# Altium PCB PCB3.PcbDoc
Units mm, origin at the board's own origin, x right, y up, seen from the top; angles counter-clockwise.
Board outline 195 x 40 mm, 2 copper layers (Top Layer, Bottom Layer); 40 components, 40 nets, 128 pads, 6 vias.
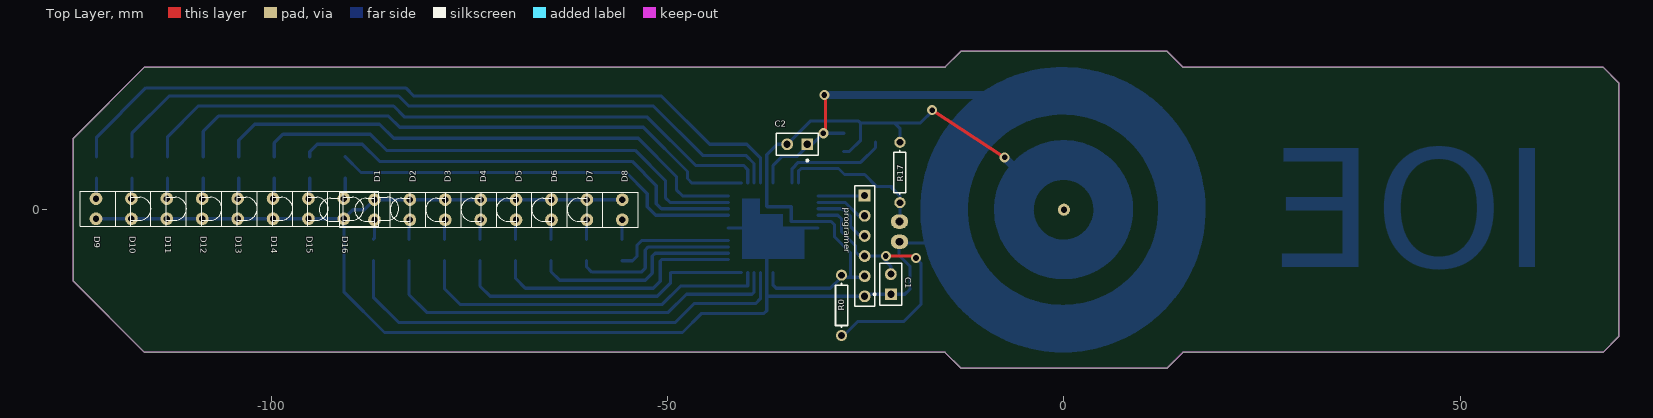
[diagram p0: Top Layer view]
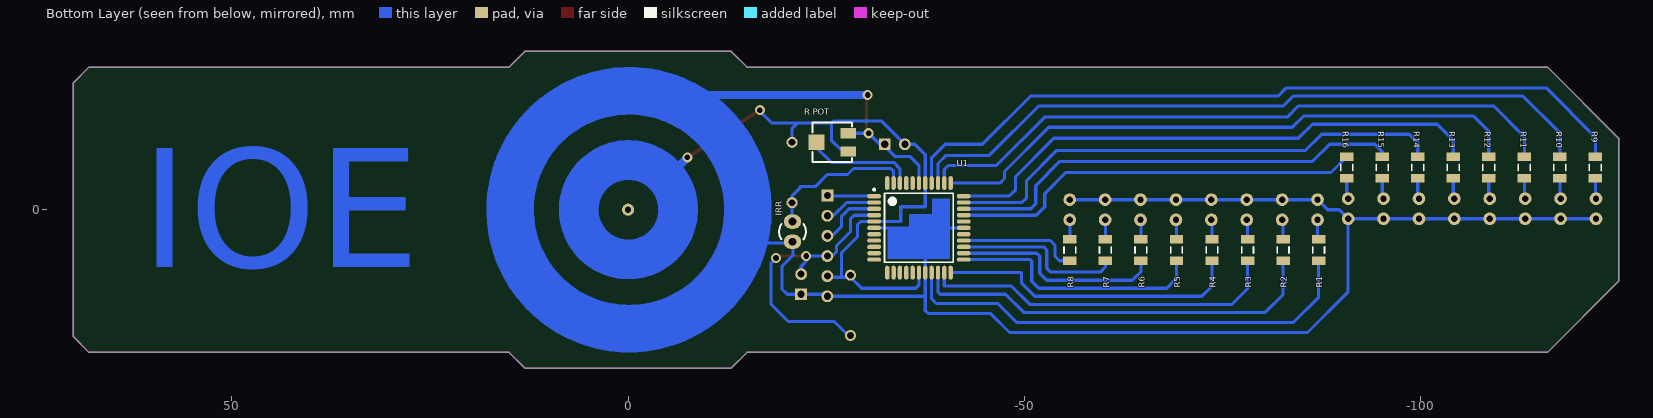
[diagram p1: Bottom Layer view, seen from below]

## Layer stack, top to bottom
Top Solder: solder mask 0.0102, Solder Resist, Dk 3.5
Top Layer: signal copper 0.0356
Dielectric 1: dielectric 0.32, FR-4, Dk 4.8
Bottom Layer: signal copper 0.0356
Bottom Solder: solder mask 0.0102, Solder Resist, Dk 3.5

## Board outline
-116,-18 -15,-18 -13,-20 13,-20 15,-18 68,-18 70,-16 70,16 68,18 15,18 13,20 -13,20 -15,18 -116,18 -125,9 -125,-9

## Design rules (kind name [scope] priority, off if disabled: settings)
Clearance [All] p1: gap=0.2 ignorepadtopadclearanceinfootprint=FALSE
PolygonConnect [All] p1: connectstyle=Relief reliefconductorwidth=0.254 reliefentries=4 polygonreliefangle="90 Angle" airgapwidth=0.254
RoutingVias [All] p1: holewidth=0.711 width=1.27 viastyle="Through Hole" minholewidth=0.711 minwidth=1.27 maxholewidth=0.711 maxwidth=1.27
SolderMaskExpansion [All] p1: expansion=0.102 istentingtop=FALSE
Width [All] p1: maxlimit=20 minlimit=0.254 preferedwidth=0.3
30 further rules are at their usual default settings.

## Components (designator, comment, footprint, x,y, rotation, side; value= is the part's Value field where it differs from the comment)
C1 "Cap" PIN2 -21.844,-10.668 r90 top value=100pF
C2 "Cap" PIN2 -32.385,8.255 r180 top value=100pF
D1 "LED1" LED-1 -86.995,0 r180 top
D2 "LED1" LED-1 -82.528,0 r180 top
D3 "LED1" LED-1 -78.061,0 r180 top
D4 "LED1" LED-1 -73.594,0 r180 top
D5 "LED1" LED-1 -69.127,0 r180 top
D6 "LED1" LED-1 -64.66,0 r180 top
D7 "LED1" LED-1 -60.193,0 r180 top
D8 "LED1" LED-1 -55.726,0 r180 top
D9 "LED1" LED-1 -122.123,0.127 r0 top
D10 "LED1" LED-1 -117.656,0.127 r0 top
D11 "LED1" LED-1 -113.189,0.127 r0 top
D12 "LED1" LED-1 -108.722,0.127 r0 top
D13 "LED1" LED-1 -104.255,0.127 r0 top
D14 "LED1" LED-1 -99.788,0.127 r0 top
D15 "LED1" LED-1 -95.321,0.127 r0 top
D16 "LED1" LED-1 -90.854,0.127 r0 top
IRR "IR R" LED-3MM -20.75,-4.04 r90 bottom
programer "Header 6" HDR1X6 -25.146,1.778 r270 top
R0 "Res1" AXIAL-0.3 -28.067,-12.065 r90 top value=1K
R1 "Res1" C1206 -87.122,-5.08 r90 bottom value=1K
R2 "Res1" C1206 -82.641,-5.08 r90 bottom value=1K
R3 "Res1" C1206 -78.159,-5.08 r90 bottom value=1K
R4 "Res1" C1206 -73.678,-5.08 r90 bottom value=1K
R5 "Res1" C1206 -69.197,-5.08 r90 bottom value=1K
R6 "Res1" C1206 -64.716,-5.08 r90 bottom value=1K
R7 "Res1" C1206 -60.234,-5.08 r90 bottom value=1K
R8 "Res1" C1206 -55.753,-5.08 r90 bottom value=1K
R9 "Res1" C1206 -122.047,5.334 r270 bottom value=1K
R10 "Res1" C1206 -117.566,5.334 r270 bottom value=1K
R11 "Res1" C1206 -113.084,5.334 r270 bottom value=1K
R12 "Res1" C1206 -108.603,5.334 r270 bottom value=1K
R13 "Res1" C1206 -104.122,5.334 r270 bottom value=1K
R14 "Res1" C1206 -99.641,5.334 r270 bottom value=1K
R15 "Res1" C1206 -95.159,5.334 r270 bottom value=1K
R16 "Res1" C1206 -90.678,5.334 r270 bottom value=1K
R17 "Res1" AXIAL-0.3 -20.701,4.699 r90 top value=4.7K
"R POT" "10K" POT4MM-2 -25.781,8.509 r0 bottom
U1 "ATmega32A-AU" 44A_N -36.703,-2.286 r180 bottom

## Footprints (in the part's own frame and the unit in brackets; to place one, negate y for a bottom-side part, rotate by r counter-clockwise, add the part's x,y. Pads: shape width x height; smd on the part's side, far side on the other; paste and mask are expansions set on the pad)
44A_N [mm] "Thin QFP, 44-Leads, Body 10x10mm, Pitch 0.8mm, IPC Medium Density"
  oval 1.75x0.55 smd: 1(-5.65,4) 2(-5.65,3.2) 3(-5.65,2.4) 4(-5.65,1.6) 5(-5.65,0.8) 6(-5.65,0) 7(-5.65,-0.8) 8(-5.65,-1.6) 9(-5.65,-2.4) 10(-5.65,-3.2) 11(-5.65,-4) 23(5.65,-4) 24(5.65,-3.2) 25(5.65,-2.4) 26(5.65,-1.6) 27(5.65,-0.8) 28(5.65,0) 29(5.65,0.8) 30(5.65,1.6) 31(5.65,2.4) 32(5.65,3.2) 33(5.65,4)
  oval 0.55x1.75 smd: 12(-4,-5.65) 13(-3.2,-5.65) 14(-2.4,-5.65) 15(-1.6,-5.65) 16(-0.8,-5.65) 17(0,-5.65) 18(0.8,-5.65) 19(1.6,-5.65) 20(2.4,-5.65) 21(3.2,-5.65) 22(4,-5.65) 34(4,5.65) 35(3.2,5.65) 36(2.4,5.65) 37(1.6,5.65) 38(0.8,5.65) 39(0,5.65) 40(-0.8,5.65) 41(-1.6,5.65) 42(-2.4,5.65) 43(-3.2,5.65) 44(-4,5.65)
  silkscreen extent -5.77,-4.35 4.35,4.95, body extent -5,-5 5,5, height 1.2
AXIAL-0.3 [mm] "Axial Device, Thru-Hole; 2 Leads; 0.3 in Pin Spacing"
  round 1.4 hole 0.85: 1(-3.81,0) 2(3.81,0)
  silkscreen extent -2.77,-0.76 2.77,0.76
C1206 [mm] "Chip Capacitor, Body 3.2x1.6mm, IPC High Density"
  rect 1.1x1.7 smd: 1(-1.35,0) 2(1.35,0)
  silkscreen extent -0.4,-0.75 0.4,0.75, body extent -1.7,-0.9 1.7,0.9, height 1.3
HDR1X6 [mm] "Connector; Header; 6 Position"
  rect 1.5x1.5 hole 0.9: 1(0,0)
  round 1.5 hole 0.9: 2(2.54,0) 3(5.08,0) 4(7.62,0) 5(10.16,0) 6(12.7,0)
  silkscreen extent -1.27,-1.27 13.97,1.27
LED-1 [mm] "LED; 2 Leads"
  round 1.6 hole 0.8: 1(0,1.27) 2(0,-1.27)
  silkscreen extent -2,-2.2 6.95,2.2
LED-3MM [mm]
  oval 1.8x2.2 hole 1: A(0,0)
  oval 1.8x2.2 hole 1 mask+0.102: K(2.54,0)
  silkscreen extent 0.31,-1.7 2.23,1.7, body extent -0.33,-1.6 2.87,1.6, height 9.5
PIN2 [mm] "Photosensitive Diode; 2 Leads"
  rect 1.5x1.5 hole 0.9: 1(0,0)
  round 1.5 hole 0.9: 2(2.54,0)
  silkscreen extent -1.4,-1.4 3.94,2.17
POT4MM-2 [mm] "Square Trimming Potentiometer"
  rect 2x1.3 smd: CCW(-2,-1.15) CW(-2,1.15)
  rect 2x2 smd: W(2,0)
  silkscreen extent -2.5,-2.5 2.5,2.5

## Part data
C1 C2: "Capacitor", LatestRevisionDate=17-Jul-2002, LatestRevisionNote="Re-released for DXP Platform.", PackageDescription="Radial Cap, Thru-Hole; 2 Leads; 0.3 in Pin Spacing", PackageReference=RAD-0.3, Published=8-Jun-2000, Publisher="Altium Limited"
D1 D2 D3 D4 D5 D6 D7 D8 D9 D10 D11 D12 D13 D14 D15 D16: library part LED2, "Typical RED, GREEN, YELLOW, AMBER GaAs LED", LatestRevisionDate=17-Jul-2002, LatestRevisionNote="Re-released for DXP Platform.", PackageDescription="SM LED; 2 Flat Leads", PackageReference=3.2X1.6X1.1, PackageVersion=Feb-2002, Published=8-Jun-2000, Publisher="Altium Limited"
IRR: library part IRR, "IR Receiver"
programer: "Header, 6-Pin", LatestRevisionDate=17-Jul-2002, LatestRevisionNote="Re-released for DXP Platform.", Publisher="Altium Limited"
R0 R1 R2 R3 R4 R5 R6 R7 R8 R9 R10 R11 R12 R13 R14 R15 R16 R17: "Resistor", LatestRevisionDate=17-Jul-2002, LatestRevisionNote="Re-released for DXP Platform.", PackageDescription="Axial Device, Thru-Hole; 2 Leads; 0.3 in Pin Spacing", PackageReference=AXIAL-0.3, Published=8-Jun-2000, Publisher="Altium Limited"
"R POT": library part "RPot SM", "Square Trimming Potentiometer", ComponentLink1Description="Manufacturer Link", ComponentLink1URL=http://bourns.com/2/search.html, DatasheetVersion=Oct-2003, PackageDescription="Square Trimming Potentiometer", PackageReference=POT4MM-2, Published=17-Dec-2003, Publisher="Altium Limited"
U1: "8-bit AVR Microcontroller, 32KB Flash, 1KB EEPROM, 2KB SRAM, 44-pin TQFP, Industrial Grade (-40°C to 85°C)", Supplier Part Number 1=ATMEGA32A-AU-ND, ComponentLink1Description="Manufacturer Link", ComponentLink1URL=http://www.atmel.com/products/avr/default.asp?, ComponentLink2Description="ATmega32A Datasheet", ComponentLink2URL=http://www.atmel.com/dyn/resources/prod_documents/doc8155.pdf, ComponentLink3Description="ATmega32A Summary", ComponentLink3URL=http://www.atmel.com/dyn/resources/prod_documents/8155S.pdf, ComponentLink4Description="Atmel.com Home", ComponentLink4URL=http://www.atmel.com, DatasheetVersion="revB, Jul-2009", PackageDescription="44-Pin Plastic Thin Profile Quad Flat Pack, 10 x 10 x 1.0 mm Body, 0.8 mm Pitch (TQFP)", PackageReference=44A, PackageVersion="rev.B, Oct-2001", Published=1-Apr-2010, Publisher="Altium Limited", Supplier 1=Digi-Key, Supplier 2=Farnell, Supplier 3=Mouser, Supplier Part Number 2=1704563, Supplier Part Number 3=556-ATMEGA32A-AU

## Free pads (board coordinates)
  round 1.524 hole 0.762: 0(0,0)

## Via types
v1: diameter 1.27, hole 0.711, Top Layer to Bottom Layer, 6 vias

## Nets (pads, with @x,y where several pads share a name; then routed paths per layer and width w, separated by ;. In a path a pad name is that pad's centre, name@x,y a point inside that pad or via, vN(x,y) a via of type N, cw(c..) or ccw(c..) an arc to the next point about the centre after c; other vN are vias at no path point)
GND: "R POT.CCW" C1.1 C2.1 D1.2 D2.2 D3.2 D4.2 D5.2 D6.2 D7.2 D8.2 D9.2 D10.2 D11.2 D12.2 D13.2 D14.2 D15.2 D16.2 IRR.A programer.6 U1.6 U1.18 U1.28 U1.39 | length 326.8
  Top Layer w0.4: v1(-30.353,9.652) -30.099,9.906 -30.099,14.351 v1(-30.226,14.478)
  Bottom Layer w0.4: D9.2 D10.2 D11.2 D12.2 D13.2 D14.2 D15.2 D16.2 ; D8.2 D7.2 D6.2 D5.2 D4.2 D3.2 D2.2 D1.2 -88.265,0 -89.711,0 D16.2 ; U1.28 -39.497,-2.286 -36.703,-2.286 ; -37.376,-10.922 programer.6 -24.892,-10.668 C1.1 -20.066,-10.668 -19.431,-10.033 -19.431,-7.112 -20.828,-5.715 -20.828,-4.191 -15.933,-4.191 ; U1.39 -36.703,5.588 -35.56,6.731 -33.655,6.731 -32.385,8.001 C2.1 -31.75,8.255 v1(-30.353,9.652) ; U1.6 -36.703,-2.286 ; v1@-30.353,9.659 -27.781,9.659 ; v1(-30.226,14.478) v1@-30.035,14.478 ; -10.795,11.636 -10.795,14.478 ; D16.2 -90.854,-10.365 -85.725,-15.494 -48.133,-15.494 -45.72,-13.081 -37.846,-13.081 -37.503,-12.738 -37.503,-10.922 U1.18 -37.503,-3.086 -36.703,-2.286
  Bottom Layer w1: v1@-30.101,14.478 -30.035,14.478 -11.5,14.478 ; -10.795,14.478 -11.5,14.478 ; -3.97,14.499 -11.5,14.478
  Bottom Layer w6: 14.868,0.388 ccw(c-0.127,0) 14.872,0.123
MISO: programer.2 U1.2 | length 6.6
  Bottom Layer w0.4: U1.2 -27.584,0.914 -25.908,-0.762 programer.2
MOSI: programer.1 U1.1 | length 5.9
  Bottom Layer w0.4: U1.1 -25.21,1.714 programer.1
NetD1_1: D1.1 R1.2 | length 2.5
  Bottom Layer w0.4: R1.2 -86.995,-3.603 D1.1
NetD2_1: D2.1 R2.2 | length 2.5
  Bottom Layer w0.4: R2.2 -82.641,-1.383 D2.1
NetD3_1: D3.1 R3.2 | length 2.5
  Bottom Layer w0.4: R3.2 -78.159,-1.368 D3.1
NetD4_1: D4.1 R4.2 | length 2.5
  Bottom Layer w0.4: R4.2 -73.678,-1.354 D4.1
NetD5_1: D5.1 R5.2 | length 2.5
  Bottom Layer w0.4: R5.2 -69.197,-1.34 D5.1
NetD6_1: D6.1 R6.2 | length 2.5
  Bottom Layer w0.4: R6.2 -64.716,-1.326 D6.1
NetD7_1: D7.1 R7.2 | length 2.5
  Bottom Layer w0.4: R7.2 -60.234,-1.311 D7.1
NetD8_1: D8.1 R8.2 | length 2.5
  Bottom Layer w0.4: R8.2 -55.753,-1.297 D8.1
NetD9_1: D9.1 R9.2 | length 2.6
  Bottom Layer w0.4: D9.1 -122.047,1.473 R9.2
NetD10_1: D10.1 R10.2 | length 2.6
  Bottom Layer w0.4: D10.1 -117.566,1.487 R10.2
NetD11_1: D11.1 R11.2 | length 2.6
  Bottom Layer w0.4: D11.1 -113.084,1.502 R11.2
NetD12_1: D12.1 R12.2 | length 2.6
  Bottom Layer w0.4: D12.1 -108.603,1.516 R12.2
NetD13_1: D13.1 R13.2 | length 2.6
  Bottom Layer w0.4: D13.1 -104.122,1.53 R13.2
NetD14_1: D14.1 R14.2 | length 2.6
  Bottom Layer w0.4: D14.1 -99.641,1.545 R14.2
NetD15_1: D15.1 R15.2 | length 2.7
  Bottom Layer w0.4: D15.1 -95.159,1.559 R15.2
NetD16_1: D16.1 R16.2 | length 2.7
  Bottom Layer w0.4: D16.1 -90.678,1.573 R16.2
NetIRR_K: IRR.K R17.1 U1.43 | length 19.3
  Bottom Layer w0.4: U1.43 -33.503,4.851 -33.147,5.207 -28.448,5.207 -27.686,4.445 -25.146,4.445 -23.622,2.921 -21.844,2.921 ; -21.717,2.921 -21.844,2.921 ; IRR.K@-20.701,-1.524 R17.1 -20.701,1.778 -21.844,2.921
NetR1_1: R1.1 U1.19 | length 59.3
  Bottom Layer w0.4: R1.1 -87.122,-11.049 -83.947,-14.224 -49.022,-14.224 -46.609,-11.811 -38.862,-11.811 -38.303,-11.252 U1.19
NetR2_1: R2.1 U1.20 | length 52.3
  Bottom Layer w0.4: R2.1 -82.641,-10.704 -80.391,-12.954 -49.911,-12.954 -47.625,-10.668 -39.37,-10.668 -39.103,-10.401 U1.20
NetR3_1: R3.1 U1.21 | length 45.3
  Bottom Layer w0.4: R3.1 -78.159,-9.979 -76.2,-11.938 -50.673,-11.938 -48.362,-9.627 -39.903,-9.627 U1.21
NetR4_1: R4.1 U1.22 | length 38.7
  Bottom Layer w0.4: R4.1 -73.678,-9.634 -72.39,-10.922 -51.308,-10.922 -49.657,-9.271 -49.657,-8.001 -49.592,-7.936 U1.22
NetR5_1: R5.1 U1.23 | length 32.6
  Bottom Layer w0.4: R5.1 -69.197,-8.654 -67.945,-9.906 -51.816,-9.906 -50.927,-9.017 -50.927,-6.477 -50.736,-6.286 U1.23
NetR6_1: R6.1 U1.24 | length 26.9
  Bottom Layer w0.4: R6.1 -64.716,-7.801 -63.627,-8.89 -52.832,-8.89 -51.943,-8.001 -51.943,-5.842 -51.587,-5.486 U1.24
NetR7_1: R7.1 U1.25 | length 21.6
  Bottom Layer w0.4: R7.1 -60.234,-7.203 -59.563,-7.874 -53.34,-7.874 -52.832,-7.366 -52.832,-5.08 -52.438,-4.686 U1.25
NetR8_1: R8.1 U1.26 | length 15.3
  Bottom Layer w0.4: R8.1 -54.436,-6.43 -53.848,-5.842 -53.848,-4.445 -53.289,-3.886 U1.26
NetR9_1: R9.1 U1.37 | length 95.6
  Bottom Layer w0.4: R9.1 -122.047,9.144 -115.824,15.367 -83.058,15.367 -82.042,14.351 -50.8,14.351 -44.704,8.255 -40.005,8.255 -38.303,6.553 U1.37
NetR10_1: R10.1 U1.36 | length 89.4
  Bottom Layer w0.4: R10.1 -117.566,9.688 -112.903,14.351 -83.947,14.351 -82.677,13.081 -51.816,13.081 -45.593,6.858 -40.132,6.858 -39.103,5.829 U1.36
NetR11_1: R11.1 U1.35 | length 82.3
  Bottom Layer w0.4: R11.1 -113.084,9.217 -109.22,13.081 -84.582,13.081 -83.185,11.684 -52.578,11.684 -46.482,5.588 -40.436,5.588 -39.903,5.055 U1.35
NetR12_1: R12.1 U1.34 | length 75.9
  Bottom Layer w0.4: R12.1 -108.603,9.888 -106.68,11.811 -85.217,11.811 -83.82,10.414 -53.086,10.414 -47.498,4.826 -47.498,3.937 -46.925,3.364 U1.34
NetR13_1: R13.1 U1.33 | length 69.4
  Bottom Layer w0.4: R13.1 -104.122,8.781 -102.108,10.795 -86.36,10.795 -84.582,9.017 -53.721,9.017 -48.895,4.191 -48.895,2.54 -48.069,1.714 U1.33
NetR14_1: R14.1 U1.32 | length 64.3
  Bottom Layer w0.4: R14.1 -99.641,8.436 -98.552,9.525 -87.503,9.525 -85.471,7.493 -54.102,7.493 -50.292,3.683 -50.292,1.524 -49.682,0.914 U1.32
NetR15_1: R15.1 U1.31 | length 58.5
  Bottom Layer w0.4: R15.1 -95.159,7.33 -94.234,8.255 -88.519,8.255 -86.36,6.096 -54.483,6.096 -51.435,3.048 -51.435,0.762 -50.787,0.114 U1.31
NetR16_1: R16.1 U1.30 | length 52.3
  Bottom Layer w0.4: R16.1 -88.693,4.699 -55.245,4.699 -52.578,2.032 -52.578,0.381 -51.511,-0.686 U1.30
"NetR POT_W": "R POT.W" U1.42 | length 14.1
  Bottom Layer w0.4: U1.42 -34.303,5.194 -33.528,5.969 -25.654,5.969 -23.781,7.842 -23.781,8.509
RESET: C1.2 programer.4 R0.1 U1.4 | length 36.3
  Top Layer w0.4: v1(-22.479,-5.842) -18.923,-5.842 v1(-18.669,-6.096)
  Bottom Layer w0.4: U1.4 -28.524,-0.686 -28.067,-1.143 -28.067,-2.794 -26.289,-4.572 -26.289,-5.334 -25.781,-5.842 programer.4 v1(-22.479,-5.842) ; R0.1@-28.067,-16.129 -26.035,-14.097 -20.193,-14.097 -18.034,-11.938 -18.034,-6.731 v1(-18.669,-6.096) ; v1@-22.796,-6.159 -21.844,-7.112 C1.2
SCK: programer.3 U1.3 | length 8.1
  Bottom Layer w0.4: U1.3 -27.927,0.114 -26.924,-0.889 -26.924,-2.159 -25.781,-3.302 programer.3
VCC: "R POT.CW" C2.2 programer.5 R0.2 R17.2 U1.5 U1.17 U1.38 | length 123.3
  Top Layer w0.4: v1(-16.637,12.573) v1(-7.493,6.604)
  Bottom Layer w0.4: U1.17 -36.703,-9.525 -36.322,-9.906 -29.464,-9.906 -28.067,-8.509 -26.924,-8.509 ; -27.781,7.359 -27.058,7.359 -25.654,8.763 -25.654,10.922 ; programer.5 -25.273,-8.509 -26.924,-8.509 ; R17.2 -20.701,10.287 -21.336,10.922 ; v1(-16.637,12.573) -16.51,12.573 -18.161,10.922 -21.336,10.922 ; -26.924,-8.509 -26.924,-5.461 -28.956,-3.429 -28.956,-1.905 -29.375,-1.486 U1.5 -34.417,-1.486 -34.417,0.381 -37.465,0.381 -37.503,0.419 U1.38 -37.503,6.947 -36.195,8.255 C2.2 -32.004,11.176 -25.908,11.176 -25.654,10.922 ; -25.654,10.922 -21.336,10.922
  Bottom Layer w1: v1(-7.493,6.604) -4.998,4.109
  Bottom Layer w5: 6.218,0.246 ccw(c-0.046,0) 6.223,0
pads on no net: U1.7 U1.8 U1.9 U1.10 U1.11 U1.12 U1.13 U1.14 U1.15 U1.16 U1.27 U1.29 U1.40 U1.41 U1.44

## Keep-outs
Keep-Out Layer:
  lines w0.2: -125,-9 -125,9 -116,18 -15,18 -13,20 13,20 15,18 43,18 68,18 70,16 70,-16 68,-18 43,-18 15,-18 13,-20 -13,-20 -15,-18 -116,-18 -125,-9

## Other copper
Bottom Layer:
  rectangle net GND: -40.64,-6.223 -38.354,1.397
  rectangle net GND: -40.64,-6.223 -32.766,-2.159
  rectangle net GND: -38.735,-2.54 -35.433,-0.508
  text "IOE" at 61.5,-7.25 h15